# EAGLE board eib (EAGLE 6.4)
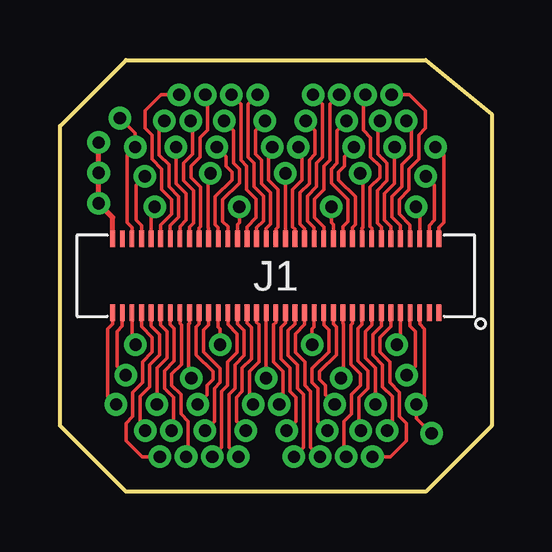
[diagram p0: board, top side]

Size 18 x 18 mm. Coordinates in mm from the lower left corner, seen from the top.
Outline: 0,2.75 0,15.25 2.75,18 15.25,18 18,15.75 18,2.75 15.25,0 2.75,0 0,2.75
Copper layers (1*16): Top 0.0178mm / dielectric 59mil / Bottom 0.0178mm
Design rules "SSC-EAGLE-2Lyr_v1.0.0.3 *": minimum track width 6mil, minimum drill 14mil, track to track 6mil, track to pad 6mil, pad to pad 6mil, via to via 6mil, smd to smd 6mil, copper to edge 20mil, drill to drill 16mil, minimum pad ring 7mil, minimum via ring 8mil, stop-mask expansion 3mil, vias tented up to drill 0mil, thermal gap 10mil

## Footprints (pad centres in the part's own frame; a part is rotated, then mirrored left to right if it is on the bottom)
PAD_20_37 = drill 0.508 pad 0.94: 1 0,0
HIROSE_DF40C-70DS = smd 0.2 x 0.7: 1 6.8,-1.54; 2 6.4,-1.54; 3 6,-1.54; 4 5.6,-1.54; 5 5.2,-1.54; 6 4.8,-1.54; 7 4.4,-1.54; 8 4,-1.54; 9 3.6,-1.54; 10 3.2,-1.54; 11 2.8,-1.54; 12 2.4,-1.54; 13 2,-1.54; 14 1.6,-1.54; 15 1.2,-1.54; 16 0.8,-1.54; 17 0.4,-1.54; 18 0,-1.54; 19 -0.4,-1.54; 20 -0.8,-1.54; 21 -1.2,-1.54; 22 -1.6,-1.54; 23 -2,-1.54; 24 -2.4,-1.54; 25 -2.8,-1.54; 26 -3.2,-1.54; 27 -3.6,-1.54; 28 -4,-1.54; 29 -4.4,-1.54; 30 -4.8,-1.54; 31 -5.2,-1.54; 32 -5.6,-1.54; 33 -6,-1.54; 34 -6.4,-1.54; 35 -6.8,-1.54; 36 -6.8,1.54; 37 -6.4,1.54; 38 -6,1.54; 39 -5.6,1.54; 40 -5.2,1.54; 41 -4.8,1.54; 42 -4.4,1.54; 43 -4,1.54; 44 -3.6,1.54; 45 -3.2,1.54; 46 -2.8,1.54; 47 -2.4,1.54; 48 -2,1.54; 49 -1.6,1.54; 50 -1.2,1.54; 51 -0.8,1.54; 52 -0.4,1.54; 53 0,1.54; 54 0.4,1.54; 55 0.8,1.54; 56 1.2,1.54; 57 1.6,1.54; 58 2,1.54; 59 2.4,1.54; 60 2.8,1.54; 61 3.2,1.54; 62 3.6,1.54; 63 4,1.54; 64 4.4,1.54; 65 4.8,1.54; 66 5.2,1.54; 67 5.6,1.54; 68 6,1.54; 69 6.4,1.54; 70 6.8,1.54

## Placement (x,y rotation side)
0_0  PAD_20_37  [PAD_20_37]  14.45,4.86 0 top
0_1  PAD_20_37  [PAD_20_37]  3.55,13.14 0 top
1_0  PAD_20_37  [PAD_20_37]  14.05,6.13 0 top
1_1  PAD_20_37  [PAD_20_37]  3.95,11.87 0 top
2_0  PAD_20_37  [PAD_20_37]  13.03,1.45 0 top
2_1  PAD_20_37  [PAD_20_37]  4.97,16.55 0 top
3_0  PAD_20_37  [PAD_20_37]  13.64,2.54 0 top
3_1  PAD_20_37  [PAD_20_37]  4.36,15.46 0 top
4_0  PAD_20_37  [PAD_20_37]  13.16,3.64 0 top
4_1  PAD_20_37  [PAD_20_37]  4.84,14.36 0 top
5_0  PAD_20_37  [PAD_20_37]  12.55,2.54 0 top
5_1  PAD_20_37  [PAD_20_37]  5.45,15.46 0 top
6_0  PAD_20_37  [PAD_20_37]  11.94,1.45 0 top
6_1  PAD_20_37  [PAD_20_37]  6.06,16.55 0 top
7_0  PAD_20_37  [PAD_20_37]  11.72,4.73 0 top
7_1  PAD_20_37  [PAD_20_37]  6.28,13.27 0 top
8_0  PAD_20_37  [PAD_20_37]  11.46,3.64 0 top
8_1  PAD_20_37  [PAD_20_37]  6.54,14.36 0 top
9_0  PAD_20_37  [PAD_20_37]  11.15,2.54 0 top
9_1  PAD_20_37  [PAD_20_37]  6.85,15.46 0 top
10_0  PAD_20_37  [PAD_20_37]  10.52,6.13 0 top
10_1  PAD_20_37  [PAD_20_37]  7.48,11.87 0 top
11_0  PAD_20_37  [PAD_20_37]  10.85,1.45 0 top
11_1  PAD_20_37  [PAD_20_37]  7.15,16.55 0 top
12_0  PAD_20_37  [PAD_20_37]  9.76,1.45 0 top
12_1  PAD_20_37  [PAD_20_37]  8.24,16.55 0 top
13_0  PAD_20_37  [PAD_20_37]  9.45,2.54 0 top
13_1  PAD_20_37  [PAD_20_37]  8.55,15.46 0 top
14_0  PAD_20_37  [PAD_20_37]  9.15,3.64 0 top
14_1  PAD_20_37  [PAD_20_37]  8.85,14.36 0 top
15_0  PAD_20_37  [PAD_20_37]  8.6,4.73 180 top
15_1  PAD_20_37  [PAD_20_37]  9.4,13.27 0 top
16_0  PAD_20_37  [PAD_20_37]  8.05,3.64 0 top
16_1  PAD_20_37  [PAD_20_37]  9.95,14.36 0 top
17_0  PAD_20_37  [PAD_20_37]  7.75,2.54 0 top
17_1  PAD_20_37  [PAD_20_37]  10.25,15.46 0 top
18_0  PAD_20_37  [PAD_20_37]  7.44,1.45 0 top
18_1  PAD_20_37  [PAD_20_37]  10.56,16.55 0 top
19_0  PAD_20_37  [PAD_20_37]  6.35,1.45 0 top
19_1  PAD_20_37  [PAD_20_37]  11.65,16.55 0 top
20_0  PAD_20_37  [PAD_20_37]  6.68,6.13 0 top
20_1  PAD_20_37  [PAD_20_37]  11.32,11.87 0 top
21_0  PAD_20_37  [PAD_20_37]  6.05,2.54 0 top
21_1  PAD_20_37  [PAD_20_37]  11.95,15.46 0 top
22_0  PAD_20_37  [PAD_20_37]  5.74,3.64 0 top
22_1  PAD_20_37  [PAD_20_37]  12.26,14.36 0 top
23_0  PAD_20_37  [PAD_20_37]  5.48,4.73 0 top
23_1  PAD_20_37  [PAD_20_37]  12.52,13.27 0 top
24_0  PAD_20_37  [PAD_20_37]  5.26,1.45 0 top
24_1  PAD_20_37  [PAD_20_37]  12.74,16.55 0 top
25_0  PAD_20_37  [PAD_20_37]  4.65,2.54 0 top
25_1  PAD_20_37  [PAD_20_37]  13.35,15.46 0 top
26_0  PAD_20_37  [PAD_20_37]  4.04,3.64 0 top
26_1  PAD_20_37  [PAD_20_37]  13.96,14.36 0 top
27_0  PAD_20_37  [PAD_20_37]  3.56,2.54 0 top
27_1  PAD_20_37  [PAD_20_37]  14.44,15.46 0 top
28_0  PAD_20_37  [PAD_20_37]  4.17,1.45 0 top
28_1  PAD_20_37  [PAD_20_37]  13.83,16.55 0 top
29_0  PAD_20_37  [PAD_20_37]  3.15,6.13 0 top
29_1  PAD_20_37  [PAD_20_37]  14.85,11.87 0 top
30_0  PAD_20_37  [PAD_20_37]  2.75,4.86 0 top
30_1  PAD_20_37  [PAD_20_37]  15.25,13.14 0 top
31_0  PAD_20_37  [PAD_20_37]  2.34,3.64 0 top
31_1  PAD_20_37  [PAD_20_37]  15.66,14.36 0 top
GND  PAD_20_37  [PAD_20_37]  1.61,12.02 0 top
GND1  PAD_20_37  [PAD_20_37]  1.61,13.29 0 top
GND2  PAD_20_37  [PAD_20_37]  1.61,14.56 0 top
J1  HIROSE_DF40-70DS  [HIROSE_DF40C-70DS]  9,9 0 top
REF_0  PAD_20_37  [PAD_20_37]  14.86,3.64 0 top
REF_0C  PAD_20_37  [PAD_20_37]  15.5,2.43 0 top
REF_1  PAD_20_37  [PAD_20_37]  3.14,14.36 0 top
REF_1C  PAD_20_37  [PAD_20_37]  2.5,15.57 0 top

## Library data of the parts
0_0 0_1 1_0 1_1 2_0 2_1 3_0 3_1 4_0 4_1 5_0 5_1 6_0 6_1 7_0 7_1 8_0 8_1 9_0 9_1 10_0 10_1 11_0 11_1 12_0 12_1 13_0 13_1 14_0 14_1 15_0 15_1 16_0 16_1 17_0 17_1 18_0 18_1 19_0 19_1 20_0 20_1 21_0 21_1 22_0 22_1 23_0 23_1 24_0 24_1 25_0 25_1 26_0 26_1 27_0 27_1 28_0 28_1 29_0 29_1 30_0 30_1 31_0 31_1 GND GND1 GND2 J1 REF_0 REF_0C REF_1 REF_1C = rpoddar

## Nets
N$1: 0_0.1 J1.4
N$2: 1_0.1 J1.5
N$3: 2_0.1 J1.6
N$4: 3_0.1 J1.7
N$5: 4_0.1 J1.8
N$6: 5_0.1 J1.9
N$7: 6_0.1 J1.10
N$8: 7_0.1 J1.11
N$9: 8_0.1 J1.12
N$10: 9_0.1 J1.13
N$11: 10_0.1 J1.14
N$12: 11_0.1 J1.15
N$13: 12_0.1 J1.16
N$14: 13_0.1 J1.17
N$15: 14_0.1 J1.18
N$16: 15_0.1 J1.19
N$17: 16_0.1 J1.20
N$18: 17_0.1 J1.21
N$19: 18_0.1 J1.22
N$20: 19_0.1 J1.23
N$21: 20_0.1 J1.24
N$22: 21_0.1 J1.25
N$23: 22_0.1 J1.26
N$24: 23_0.1 J1.27
N$25: 24_0.1 J1.28
N$26: 25_0.1 J1.29
N$27: 26_0.1 J1.30
N$28: 27_0.1 J1.31
N$29: 28_0.1 J1.32
N$30: 29_0.1 J1.33
N$31: 30_0.1 J1.34
N$32: 31_0.1 J1.35
N$33: 0_1.1 J1.39
N$34: 1_1.1 J1.40
N$35: 2_1.1 J1.41
N$36: 3_1.1 J1.42
N$37: 4_1.1 J1.43
N$38: 5_1.1 J1.44
N$39: 6_1.1 J1.45
N$40: 7_1.1 J1.46
N$41: 8_1.1 J1.47
N$42: 9_1.1 J1.48
N$43: 10_1.1 J1.49
N$44: 11_1.1 J1.50
N$45: 12_1.1 J1.51
N$46: 13_1.1 J1.52
N$47: 14_1.1 J1.53
N$48: 15_1.1 J1.54
N$49: 16_1.1 J1.55
N$50: 17_1.1 J1.56
N$51: 18_1.1 J1.57
N$52: 19_1.1 J1.58
N$53: 20_1.1 J1.59
N$54: 21_1.1 J1.60
N$55: 22_1.1 J1.61
N$56: 23_1.1 J1.62
N$57: 24_1.1 J1.63
N$58: 25_1.1 J1.64
N$59: 26_1.1 J1.65
N$60: 27_1.1 J1.66
N$61: 28_1.1 J1.67
N$62: 29_1.1 J1.68
N$63: 30_1.1 J1.69
N$64: 31_1.1 J1.70
N$65: J1.3 REF_0.1 REF_0C.1
N$66: J1.38 REF_1.1 REF_1C.1
N$67: GND1.1 GND2.1 GND.1 J1.36

## Tracks (layer width: path | path; a pad name or v marks a point on that pad's centre or on a via)
N$1
  Top 0.152: J1.4 14.6,6.91 14.82,6.68 14.82,5.22 0_0.1
N$2
  Top 0.152: J1.5 14.2,6.28 1_0.1
N$3
  Top 0.152: J1.6 13.8,6.88 13.35,6.43 13.35,5.82 13.76,5.41 13.76,4.55 14.16,4.14 14.16,3.13 14.44,2.85 14.44,2.11 13.78,1.45 2_0.1
N$4
  Top 0.152: 3_0.1 13.86,2.84 13.86,3.97 13.45,4.37 13.45,5.29 13.04,5.69 13.04,6.56 13.4,6.91 J1.7
N$5
  Top 0.152: 4_0.1 13.15,3.64 13.15,5.16 12.74,5.57 12.74,6.68 13,6.94 J1.8
N$6
  Top 0.152: 5_0.1 12.46,2.63 12.46,3.93 12.84,4.31 12.84,5.03 12.44,5.44 12.44,6.81 12.6,6.98 J1.9
N$7
  Top 0.152: 6_0.1 11.85,1.54 11.85,2.92 12.16,3.23 12.16,4.05 12.54,4.44 12.54,4.91 12.13,5.31 12.13,6.94 12.2,7.01 J1.10
N$8
  Top 0.152: J1.11 11.8,7.01 11.83,6.99 11.83,4.83 7_0.1
N$9
  Top 0.152: 8_0.1 11.06,4.03 11.06,4.44 10.82,4.68 10.82,5.01 11.52,5.71 11.52,6.86 11.4,6.98 J1.12
N$10
  Top 0.152: 9_0.1 10.76,2.94 10.76,4.31 10.52,4.55 10.52,5.13 11.22,5.83 11.22,6.73 11,6.95 J1.13
N$11
  Top 0.152: J1.14 10.6,6.86 10.52,6.77 10_0.1
N$12
  Top 0.152: 11_0.1 10.45,1.84 10.45,4.18 10.21,4.42 10.21,5.4 9.82,5.79 9.82,6.58 10.2,6.96 J1.15
N$13
  Top 0.152: 12_0.1 10.15,1.84 10.15,4.05 9.91,4.3 9.91,5.27 9.51,5.67 9.51,6.71 9.8,6.99 J1.16
N$14
  Top 0.152: 13_0.1 9.85,2.94 9.85,3.93 9.6,4.17 9.6,5.15 9.21,5.54 9.21,6.84 9.4,7.03 J1.17
N$15
  Top 0.152: 14_0.1 9.3,3.79 9.3,5.02 8.9,5.41 8.9,6.96 9,7.06 J1.18
N$16
  Top 0.152: J1.19 15_0.1
N$17
  Top 0.152: 16_0.1 7.9,3.79 7.9,5.02 8.29,5.41 8.29,6.96 8.2,7.06 J1.20
N$18
  Top 0.152: 17_0.1 7.36,2.94 7.36,3.93 7.6,4.17 7.6,5.15 7.99,5.54 7.99,6.84 7.8,7.03 J1.21
N$19
  Top 0.152: 18_0.1 7.05,1.84 7.05,4.05 7.29,4.3 7.29,5.27 7.69,5.67 7.69,6.71 7.4,6.99 J1.22
N$20
  Top 0.152: 19_0.1 6.75,1.84 6.75,4.18 6.99,4.42 6.99,5.4 7.38,5.79 7.38,6.58 7,6.96 J1.23
N$21
  Top 0.152: J1.24 6.6,6.86 6.68,6.77 20_0.1
N$22
  Top 0.152: 21_0.1 6.44,2.94 6.44,4.31 6.68,4.55 6.68,5.13 5.98,5.83 5.98,6.73 6.2,6.95 J1.25
N$23
  Top 0.152: 22_0.1 6.14,4.03 6.14,4.44 6.38,4.68 6.38,5.01 5.68,5.71 5.68,6.86 5.8,6.98 J1.26
N$24
  Top 0.152: J1.27 5.4,7.01 5.37,6.99 5.37,4.83 23_0.1
N$25
  Top 0.152: 24_0.1 5.35,1.54 5.35,2.92 5.04,3.23 5.04,4.05 4.66,4.44 4.66,4.91 5.07,5.31 5.07,6.94 5,7.01 J1.28
N$26
  Top 0.152: 25_0.1 4.74,2.63 4.74,3.93 4.36,4.31 4.36,5.03 4.76,5.44 4.76,6.81 4.6,6.98 J1.29
N$27
  Top 0.152: 26_0.1 4.05,3.64 4.05,5.16 4.46,5.57 4.46,6.68 4.2,6.94 J1.30
N$28
  Top 0.152: 27_0.1 3.34,2.84 3.34,3.97 3.75,4.37 3.75,5.29 4.16,5.69 4.16,6.56 3.8,6.91 J1.31
N$29
  Top 0.152: J1.32 3.4,6.88 3.85,6.43 3.85,5.82 3.44,5.41 3.44,4.55 3.04,4.14 3.04,3.13 2.76,2.85 2.76,2.11 3.42,1.45 28_0.1
N$30
  Top 0.152: J1.33 3,6.28 29_0.1
N$31
  Top 0.152: J1.34 2.6,6.91 2.38,6.68 2.38,5.22 30_0.1
N$32
  Top 0.152: J1.35 2.2,6.99 2,6.79 2,3.98 31_0.1
N$33
  Top 0.152: J1.39 3.4,11.09 3.18,11.32 3.18,12.78 0_1.1
N$34
  Top 0.152: J1.40 3.8,11.72 1_1.1
N$35
  Top 0.152: J1.41 4.2,11.12 4.65,11.57 4.65,12.18 4.24,12.59 4.24,13.45 3.84,13.86 3.84,14.87 3.56,15.15 3.56,15.89 4.22,16.55 2_1.1
N$36
  Top 0.152: 3_1.1 4.14,15.16 4.14,14.03 4.55,13.63 4.55,12.71 4.96,12.31 4.96,11.44 4.6,11.09 J1.42
N$37
  Top 0.152: 4_1.1 4.85,14.36 4.85,12.84 5.26,12.43 5.26,11.32 5,11.06 J1.43
N$38
  Top 0.152: 5_1.1 5.54,15.37 5.54,14.07 5.16,13.69 5.16,12.97 5.57,12.56 5.57,11.19 5.4,11.02 J1.44
N$39
  Top 0.152: 6_1.1 6.15,16.46 6.15,15.07 5.84,14.77 5.84,13.95 5.46,13.56 5.46,13.09 5.87,12.69 5.87,11.06 5.8,10.99 J1.45
N$40
  Top 0.152: J1.46 6.2,10.99 6.17,11.01 6.17,13.17 7_1.1
N$41
  Top 0.152: 8_1.1 6.94,13.97 6.94,13.56 7.18,13.32 7.18,12.99 6.48,12.29 6.48,11.14 6.6,11.02 J1.47
N$42
  Top 0.152: 9_1.1 7.24,15.06 7.24,13.69 7.48,13.45 7.48,12.86 6.78,12.17 6.78,11.27 7,11.05 J1.48
N$43
  Top 0.152: J1.49 7.4,11.14 7.48,11.23 10_1.1
N$44
  Top 0.152: 11_1.1 7.55,16.16 7.55,13.82 7.79,13.58 7.79,12.6 8.18,12.2 8.18,11.42 7.8,11.04 J1.50
N$45
  Top 0.152: 12_1.1 7.85,16.16 7.85,13.95 8.09,13.7 8.09,12.73 8.49,12.33 8.49,11.29 8.2,11 J1.51
N$46
  Top 0.152: 13_1.1 8.15,15.06 8.15,14.07 8.4,13.83 8.4,12.85 8.79,12.46 8.79,11.16 8.6,10.97 J1.52
N$47
  Top 0.152: 14_1.1 8.7,14.21 8.7,12.98 9.1,12.59 9.1,11.04 9,10.94 J1.53
N$48
  Top 0.152: J1.54 15_1.1
N$49
  Top 0.152: 16_1.1 10.1,14.21 10.1,12.98 9.71,12.59 9.71,11.04 9.8,10.94 J1.55
N$50
  Top 0.152: 17_1.1 10.64,15.06 10.64,14.07 10.4,13.83 10.4,12.85 10.01,12.46 10.01,11.16 10.2,10.97 J1.56
N$51
  Top 0.152: 18_1.1 10.95,16.16 10.95,13.95 10.71,13.7 10.71,12.73 10.31,12.33 10.31,11.29 10.6,11 J1.57
N$52
  Top 0.152: 19_1.1 11.25,16.16 11.25,13.82 11.01,13.58 11.01,12.6 10.62,12.2 10.62,11.42 11,11.04 J1.58
N$53
  Top 0.152: J1.59 11.4,11.14 11.32,11.23 20_1.1
N$54
  Top 0.152: 21_1.1 11.56,15.06 11.56,13.69 11.32,13.45 11.32,12.86 12.02,12.17 12.02,11.27 11.8,11.05 J1.60
N$55
  Top 0.152: 22_1.1 11.86,13.97 11.86,13.56 11.62,13.32 11.62,12.99 12.32,12.29 12.32,11.14 12.2,11.02 J1.61
N$56
  Top 0.152: J1.62 12.6,10.99 12.63,11.01 12.63,13.17 23_1.1
N$57
  Top 0.152: 24_1.1 12.65,16.46 12.65,15.07 12.96,14.77 12.96,13.95 13.34,13.56 13.34,13.09 12.93,12.69 12.93,11.06 13,10.99 J1.63
N$58
  Top 0.152: 25_1.1 13.26,15.37 13.26,14.07 13.64,13.69 13.64,12.97 13.23,12.56 13.23,11.19 13.4,11.02 J1.64
N$59
  Top 0.152: 26_1.1 13.95,14.36 13.95,12.84 13.54,12.43 13.54,11.32 13.8,11.06 J1.65
N$60
  Top 0.152: 27_1.1 14.66,15.16 14.66,14.03 14.25,13.63 14.25,12.71 13.85,12.31 13.85,11.44 14.2,11.09 J1.66
N$61
  Top 0.152: J1.67 14.6,11.12 14.15,11.57 14.15,12.18 14.56,12.59 14.56,13.45 14.96,13.86 14.96,14.87 15.24,15.15 15.24,15.89 14.58,16.55 28_1.1
N$62
  Top 0.152: J1.68 15,11.72 29_1.1
N$63
  Top 0.152: J1.69 15.4,11.09 15.62,11.32 15.62,12.78 30_1.1
N$64
  Top 0.152: J1.70 15.8,11.01 16,11.21 16,14.02 31_1.1
N$65
  Top 0.152: J1.3 15,6.99 15.2,6.79 15.2,3.98 REF_0.1 14.86,3.06 REF_0C.1
N$66
  Top 0.152: J1.38 3,11.01 2.8,11.21 2.8,14.02 REF_1.1 3.14,14.94 REF_1C.1
N$67
  Top 0.203: J1.36 2.2,11.43 GND.1 GND1.1 GND2.1